# Altium PCB PCB_DYBoard_Transducer_CAN_ADS1113_V1.PcbDoc
Units mm, origin at the board's own origin, x right, y up, seen from the top; angles counter-clockwise.
Board outline 152.4 x 101.6 mm, 2 copper layers (Top Layer, Bottom Layer); 29 components, 13 nets, 66 pads, 52 vias.
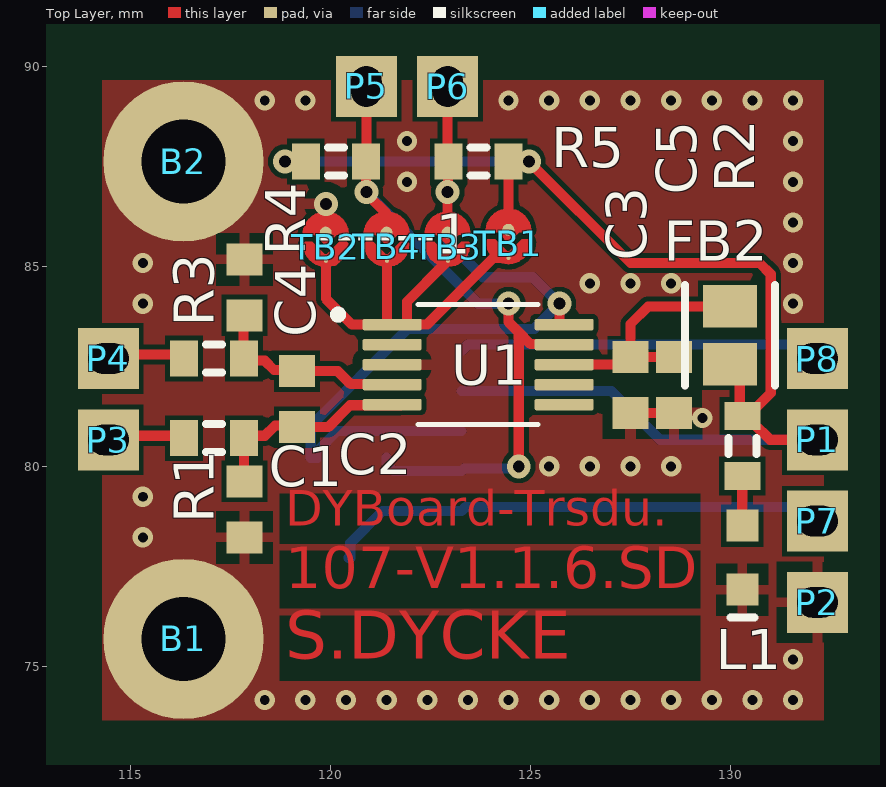
[diagram p0: Top Layer view]
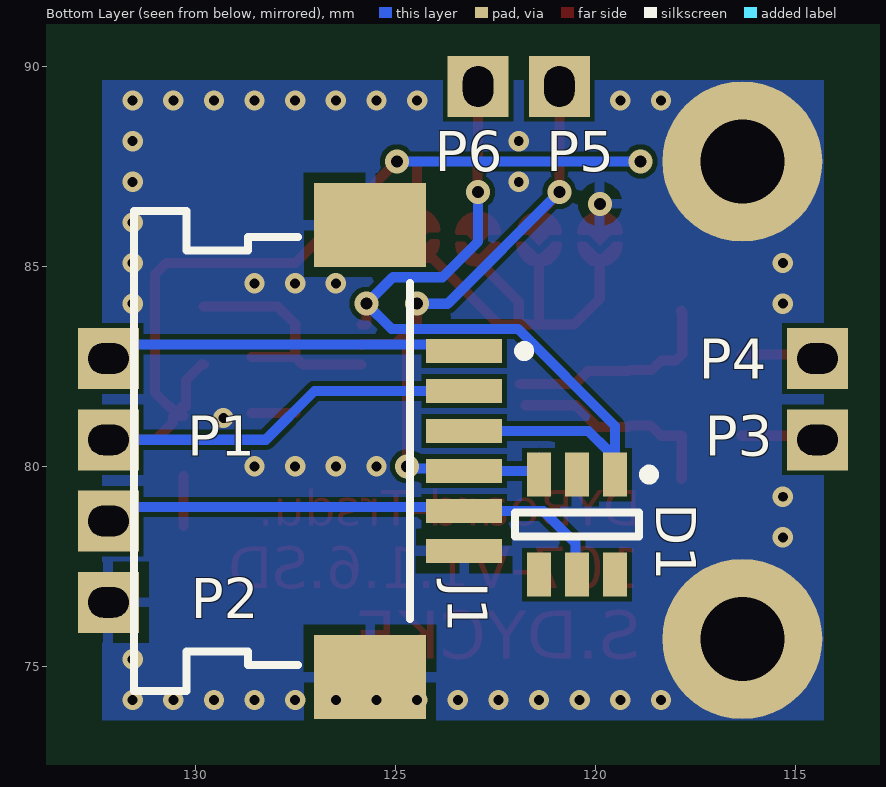
[diagram p1: Bottom Layer view, seen from below]

## Layer stack, top to bottom
Top Solder: solder mask 0.0102, Solder Resist, Dk 3.5
Top Layer: signal copper 0.0356
Dielectric 1: dielectric 0.32, FR-4, Dk 4.8
Bottom Layer: signal copper 0.0356
Bottom Solder: solder mask 0.0102, Solder Resist, Dk 3.5

## Board outline
25.4,25.4 177.8,25.4 177.8,127 25.4,127

## Design rules (kind name [scope] priority, off if disabled: settings)
Clearance [All] p1: gap=0.127 ignorepadtopadclearanceinfootprint=FALSE
ComponentClearance [All] p1: gap=0.127 collisioncheckmode=3 verticalgap=0.127 showdistances=FALSE
HoleToHoleClearance [All] p1: gap=0.127 allowstackedmicrovias=TRUE
MinimumSolderMaskSliver [All] p1: minsoldermaskwidth=0.127
PlaneConnect [All] p1: planeconnectstyle=Relief reliefexpansion=0.508 reliefentries=4 reliefconductorwidth=0.254 reliefairgap=0.127
PolygonConnect PolygonConnect_2 [HasFootprint('v60h30m70')] p1: connectstyle=Direct reliefconductorwidth=0.254 reliefentries=4 polygonreliefangle="90 Angle" airgapwidth=0.254
PolygonConnect PolygonConnect_1 [HasFootprint('bolt_M2')] p2: connectstyle=Direct reliefconductorwidth=0.254 reliefentries=4 polygonreliefangle="90 Angle" airgapwidth=0.254
PolygonConnect [All] p3: connectstyle=Relief reliefconductorwidth=0.254 reliefentries=4 polygonreliefangle="90 Angle" airgapwidth=0.254
RoutingVias [All] p1: holewidth=0.3 width=0.6 viastyle="Through Hole" minholewidth=0.3 minwidth=0.67 maxholewidth=1 maxwidth=1.27
SilkToSilkClearance [All] p1: silktosilkclearance=0.127
SilkToSolderMaskClearance [IsPad] p1: minsilkscreentomaskgap=0.127 clearancetoexposedcopper=TRUE
SolderMaskExpansion [All] p1: expansion=0.102 istentingtop=FALSE
UnRoutedNet [All] p1: checkbadconnections=TRUE
Width [All] p1: maxlimit=1.016 minlimit=0.254 preferedwidth=0.254
23 further rules are at their usual default settings.

## Components (designator, comment, footprint, x,y, rotation, side; value= is the part's Value field where it differs from the comment)
B1 "bolt_M2" bolt_M2#1 116.332,75.692 r0 top
B2 "bolt_M2" bolt_M2#2 130.302,87.63 r0 top
C1 "Cap Semi" 1608[0603] 117.856,78.932 r270 top value=0pF
C2 "Cap Semi" 1608[0603] 119.172,81.688 r270 top value=0pF
C3 "Cap Semi" 1608[0603] 127.508,82.042 r90 top value=100nF
C4 "Cap Semi" 1608[0603] 117.856,84.482 r270 top value=0pF
C5 "Cap Semi" 1608[0603] 128.6,82.042 r90 top value=1µF
D1 "SRV05-4.TCT" SMTC-SOT23-6_V 120.462,78.552 r270 bottom
FB2 "BLM21PG121SN1D" FP-BLM21-0_2-t0_85-e0_5-d-IPC_C 129.997,83.287 r270 top
J1 "SEB_MOLeX_6p" SEB_MOLeX_6p 128.016,80.518 r270 bottom locked
L1 "150060BS75000" 0603_A 130.302,77.724 r90 top (schematic designator LED1)
P1 "solderPad" solderPad_2#1 132.08,81.026 r0 top
P2 "solderPad" solderPad_2#1 132.08,76.962 r0 top
P3 "solderPad" solderPad_2#2 114.4,80.772 r0 top
P4 "solderPad" solderPad_2#3 114.554,82.704 r0 top
P5 "solderPad" solderPad_2#4 120.904,89.408 r90 top
P6 "solderPad" solderPad_2#4 122.936,89.408 r90 top
P7 "solderPad" solderPad_2#1 132.08,78.994 r0 top
P8 "solderPad" solderPad_2#1 132.08,83.058 r0 top
R1 "Res3" J1-0603 117.094,80.712 r0 top
R2 "Res3" J1-0603 130.302,80.518 r90 top
R3 "Res3" J1-0603 117.094,82.704 r0 top
R4 "Res3" J1-0603 120.142,87.63 r180 top
R5 "Res3" J1-0603 123.71,87.63 r0 top
TB1 "tin_bridge" tin_bridge#1 124.46,86.52 r180 top
TB2 "tin_bridge" tin_bridge#2 119.893,86.45 r180 top
TB3 "tin_bridge" tin_bridge#1 122.941,86.45 r180 top
TB4 "tin_bridge" tin_bridge#3 121.417,86.45 r180 top
U1 "ADS1113BQDGSRQ1" SOP50P490X110-10N 123.698,82.55 r0 top

## Footprints (in the part's own frame and the unit in brackets; to place one, negate y for a bottom-side part, rotate by r counter-clockwise, add the part's x,y. Pads: shape width x height; smd on the part's side, far side on the other; paste and mask are expansions set on the pad)
0603_A [mm] "Chip LED, 2-Leads, Body 1.6x0.8mm, IPC Medium Density"
  rect 0.8x0.8 smd: 1(-0.8,0) 2(0.8,0)
  silkscreen extent -1.5,-0.3 -1.5,0.3, body extent -0.8,-0.4 0.8,0.4, height 0.7
1608[0603] [mm] "Chip Capacitor, Body 1.6x0.8mm, IPC High Density"
  rect 0.8x0.9 smd: 1(-0.7,0) 2(0.7,0)
  body extent -0.87,-0.48 0.87,0.48, height 1.3
bolt_M2#1 [mm]
  round 4 hole 2.1: 20(0,0)
bolt_M2#2 [mm]
  round 4 hole 2.1: 20(-13.97,0)
FP-BLM21-0_2-t0_85-e0_5-d-IPC_C [mm]
  rect 1.055x1.356 smd paste+0 mask+0: 1(-0.726,0) 2(0.726,0)
  silkscreen extent -1.25,-1.12 1.25,1.12, body extent -1.35,-0.82 1.35,0.82, height 0.25
J1-0603 [mm] "Chip Resistor, Body 1.6x0.8mm, IPC High Density"
  rect 0.7x0.9 smd: 1(-0.75,0) 2(0.75,0)
  silkscreen extent -0.2,-0.35 0.2,0.35, body extent -0.85,-0.48 0.85,0.48, height 0.9
SEB_MOLeX_6p [mm] "52207-0633"
  rect 0.6x1.9 smd: 1(-2.373,4.731) 2(-1.373,4.731) 3(-0.373,4.731) 4(0.627,4.731) 5(1.627,4.731) 6(2.627,4.731)
  rect 2.1x2.8 smd: MP1(-5.523,2.381) MP2(5.777,2.381)
  silkscreen extent -5.87,-3.52 6.13,6.36, body extent -6.02,-3.47 6.28,5.44, height 2.71
SMTC-SOT23-6_V [mm] "SOT23, 6-Leads, Body 3.15x1.7mm, Pitch 0.95mm"
  rect 1.1x0.6 smd: 1(-1.25,0.95) 2(-1.25,0) 3(-1.25,-0.95) 4(1.25,-0.95) 5(1.25,0) 6(1.25,0.95)
  silkscreen extent -1.37,-1.55 0.3,1.92, body extent -0.87,-1.55 0.87,1.55, height 1.45
solderPad_2#1 [mil]
  rect 60x60 hole 30 slot 40 at 0 deg: 20(3.94,-13.94)
solderPad_2#2 [mil]
  rect 60x60 hole 30 slot 40 at 0 deg: 20(2.13,-3.94)
solderPad_2#3 [mil]
  rect 60x60 hole 30 slot 40 at 0 deg: 20(-3.94,0)
solderPad_2#4 [mil]
  rect 60x60 hole 30 slot 40 at 0 deg: 20(3.94,0)
SOP50P490X110-10N [mm]
  rrect25% 1.47x0.28 smd: 1(-2.15,1) 2(-2.15,0.5) 3(-2.15,0) 4(-2.15,-0.5) 5(-2.15,-1) 6(2.15,-1) 7(2.15,-0.5) 8(2.15,0) 9(2.15,0.5) 10(2.15,1)
  silkscreen extent -3.6,-1.5 1.5,1.5
tin_bridge#1 [mm]
  round 0.1 smd mask+0: 21(0,1.303)
  round 0.3 smd mask+0: 22(0.005,0.598)
  Top Layer region: -0.509,0.598 -0.503,0.598 -0.249,0.127 0.254,0.127 0.519,0.598 0.259,0.598 0.005,0.852 -0.249,0.598 -0.503,0.598
  Top Layer region: -0.508,0.889 -0.354,0.889 -0.051,1.192 0.056,1.192 0.359,0.889 0.513,0.889 0.508,0.894 0.381,1.143 0.254,1.397 -0.254,1.397 -0.381,1.143
  Top Layer lines w0.127: 0.519,0.598 cw(c0.005,0.643) 0.002,0.127 cw(c0.005,0.643) -0.509,0.598 ; 0.513,0.598 0.259,0.598 0.132,0.725 0.005,0.852 -0.122,0.725 -0.249,0.598 -0.503,0.598 ; 0.513,0.889 ccw(c0.005,0.889) 0.299,1.303 ccw(c0.005,0.889) 0,1.397 ccw(c0.005,0.889) -0.503,0.889 -0.354,0.889 -0.051,1.192 0,1.192 0.056,1.192 0.359,0.889 0.513,0.889
tin_bridge#2 [mm]
  round 0.1 smd mask+0: 21(0,1.303)
  round 0.3 smd mask+0: 22(0.005,0.598)
  Top Layer region: -0.509,0.598 -0.503,0.598 -0.249,0.127 0.254,0.127 0.519,0.598 0.259,0.598 0.005,0.852 -0.249,0.598 -0.503,0.598
  Top Layer region: -0.508,0.889 -0.354,0.889 -0.051,1.192 0.056,1.192 0.359,0.889 0.513,0.889 0.508,0.894 0.381,1.143 0.254,1.397 -0.254,1.397 -0.381,1.143
  Top Layer lines w0.127: 0.519,0.598 cw(c0.005,0.643) 0.005,0.127 cw(c0.005,0.643) -0.509,0.598 ; 0.513,0.598 0.259,0.598 0.132,0.725 0.005,0.852 -0.122,0.725 -0.249,0.598 -0.503,0.598 ; 0.513,0.889 ccw(c0.005,0.889) 0.005,1.397 ccw(c0.005,0.889) 0,1.397 ccw(c0.005,0.889) -0.115,1.383 ccw(c0.005,0.889) -0.23,1.339 ccw(c0.005,0.889) -0.503,0.889 -0.354,0.889 -0.051,1.192 0,1.192 0.056,1.192 0.359,0.889 0.513,0.889
tin_bridge#3 [mm]
  round 0.1 smd mask+0: 21(0,1.303)
  round 0.3 smd mask+0: 22(0.005,0.598)
  Top Layer region: -0.509,0.598 -0.503,0.598 -0.249,0.127 0.254,0.127 0.519,0.598 0.259,0.598 0.005,0.852 -0.249,0.598 -0.503,0.598
  Top Layer region: -0.508,0.889 -0.354,0.889 -0.051,1.192 0.056,1.192 0.359,0.889 0.513,0.889 0.508,0.894 0.381,1.143 0.254,1.397 -0.254,1.397 -0.381,1.143
  Top Layer lines w0.127: 0.519,0.598 cw(c0.005,0.643) 0.005,0.127 cw(c0.005,0.643) -0.509,0.598 ; 0.513,0.598 0.259,0.598 0.132,0.725 0.005,0.852 -0.122,0.725 -0.249,0.598 -0.503,0.598 ; 0.513,0.889 ccw(c0.005,0.889) 0,1.397 ccw(c0.005,0.889) -0.503,0.889 -0.354,0.889 -0.051,1.192 0,1.192 0.056,1.192 0.359,0.889 0.513,0.889

## Part data
C1 C2 C3 C4 C5: "Capacitor (Semiconductor SIM Model)", LatestRevisionDate=29-May-2009, LatestRevisionNote="IPC-7351 Footprint Added.", PackageDescription="Chip Capacitor", PackageReference=C1206, Published=8-Jun-2000, Publisher="Altium Limited"
D1: library part CMP-2000-05358-1, "RailClamp(R) Low Capacitance TVS Diode Array, 5 pF, 17.5 VC, -55 to 125 degC, 6-Pin SOT23, RoHS, Tape and Reel", Capacitance Value=5pF, Clamping Voltage=17.5V, Clamping Voltage (Max)=12.5V, Leakage Current=5uA, Manufacturer=Semtech, Operating Temp Range=-55Cto125C, Operating Temperature Classification=Military, Operating Temperature Max Deg. C=125C, Operating Temperature Min Deg. C=-55C, Package / Case=SOT-23, Package Description="6-Pin Small Outline Transistor, Body 2.9 x 1.6 mm, Pitch 0.95 mm", Package Reference=SOT23-6, Peak Pulse Current=12A, Peak Pulse Power Dissipation=300W, Reverse Breakdown Voltage=6V, Reverse Stand-off Voltage=5V, Test Current (It)=1mA, Configuration=Quad, Datasheet URL=https://datasheet.ciiva.com/8029/srv05-4-8029973.pdf, Datasheet Version=Jan-08, Direction Type=Uni-Directional, Leakage Current (Max)=5uA, Manufacturer URL=http://www.semtech.com/, Mounting=SurfaceMount, Mounting Style=SurfaceMount, Number of Elements=1, Packaging=TapeandReel, Pin Count=6, Polarity=Uni-Directional, Product Depth (mm)=1.6mm, Product Height (mm)=1.15mm, Product Length (mm)=2.9mm, Rad Hardened=No, Suppressor Type=DiodeArrays, Working Voltage=5V, Working Voltage (Max)=5V
FB2: library part CMP-0686-00612-3, "Chip Ferrite Bead, 0805, 120Ω @ 100MHz, 0.03Ω, 25%, 3A", Case Code (Imperial)=0805, Case Code (Metric)=2012, Current Rating=3A, DC Resistance (DCR)=30mR, Max Operating Temperature=125°C, Min Operating Temperature=-55°C, Package Quantity=1, Test Frequency=100MHz, Tolerance=25%, Case/Package=0805, DC Resistance-Max=30mR, Depth=1.25mm, Height=0.85mm, Impedance=120R, Lead Free="Lead Free", Length=2mm, Material=Steel, Max Current Rating=3A, Max DC Current=3A, Number of Circuits=1, Number of Lines=1, Number of Pins=2, Packaging="Tape and Reel", REACH SVHC="No SVHC", RoHS Compliant=Yes, Series=BLM21P, Termination=SMD/SMT, Width=1.25mm
L1: library part CMP-1426-00003-1, "SMD mono-color Chip LED, WL-SMCW, Blue", Color=Blue, Manufacturer="Wuerth Elektronik", ComponentLink1Description="Manufacturer URL", ComponentLink1URL=http://www.we-online.com, ComponentLink2Description=Datasheet, ComponentLink2URL=http://katalog.we-online.com/led/datasheet/150060BS75000.pdf, PackageReference=0603_A, PartNumber=150060BS75000
R1 R2 R3 R4 R5: "Resistor", LatestRevisionDate=29-May-2009, LatestRevisionNote="IPC-7351 Footprint Added.", PackageDescription="Chip Resistor", PackageReference=J1-0603, Published=8-Jun-2000, Publisher="Altium Limited"
U1: Package=None, Availability=Unavailable, MP=ADS1113BQDGSRQ1, Price=None

## Via types
v1: diameter 0.508, hole 0.25, Top Layer to Bottom Layer, 44 vias
v2: diameter 0.6, hole 0.3, Top Layer to Bottom Layer, 8 vias

## Nets (pads, with @x,y where several pads share a name; then routed paths per layer and width w, separated by ;. In a path a pad name is that pad's centre, name@x,y a point inside that pad or via, vN(x,y) a via of type N, cw(c..) or ccw(c..) an arc to the next point about the centre after c; other vN are vias at no path point)
(3.3V): D1.5 J1.5 P7.20 | length 12.5
  Bottom Layer w0.254: D1.5@120.462,77.724 120.501,77.724 120.502,77.725 120.502,78.084 121.309,78.891 J1.5 123.388,78.994 P7.20@132.18,78.994
(-5V): J1.1 P8.20 | length 9
  Bottom Layer w0.254: J1.1 123.452,83.058 P8.20@132.18,83.058
+5V: FB2.2 J1.2 P1.20 R2.2 R4.2 R5.2 TB1.22 | length 31.4
  Top Layer w0.254: 124.458,86.487 124.46,86.49 R5.2 ; v2(124.968,87.63) 127.508,85.09 130.734,85.09 131.013,84.811 131.013,81.843 130.661,81.491 130.625,81.491 R2.2@130.544,81.41 ; FB2.2@129.794,82.55 129.85,82.55 130.24,82.16 130.24,81.491 130.345,81.491 130.568,81.268 130.568,81.102 130.998,80.672 P1.20 ; R2.2 R2.2@130.544,81.268
  Bottom Layer w0.254: v2(118.872,87.63) v2(124.968,87.63) ; J1.2 127.027,81.891 128.245,80.672 P1.20
AN: P3.20 R1.1 | length 1.9
  Top Layer w0.254: P3.20@114.454,80.772 R1.1@116.344,80.772
AP: P4.20 R3.1 | length 1.9
  Top Layer w0.254: P4.20@114.454,82.804 R3.1@116.344,82.804
GND: B1.20 B2.20 C1.2 C3.1 C4.1 C5.1 D1.2 J1.6 J1.MP1 J1.MP2 L1.1 P2.20 TB2.22 U1.3 | length 1.6
  Top Layer w0.254: 119.888,86.106 119.888,86.323 119.888,86.567 v2(119.893,86.572) ; C3.1 C5.1
  other v1: 118.364,74.168 119.38,74.168 120.396,74.168 121.412,74.168 122.428,74.168 123.444,74.168 124.46,74.168 125.476,74.168 126.492,74.168 127.508,74.168 128.524,74.168 129.54,74.168 130.556,74.168 131.572,74.168 131.572,75.184 115.316,78.232 115.316,79.248 125.476,80.01 126.492,80.01 127.508,80.01 128.524,80.01 129.304,81.215 115.316,84.074 131.572,84.074 126.492,84.582 127.508,84.582 128.524,84.582 115.316,85.09 131.572,85.09 131.572,86.106 121.92,87.122 131.572,87.122 121.92,88.138 131.572,88.138 118.364,89.154 119.38,89.154 124.46,89.154 125.476,89.154 126.492,89.154 127.508,89.154 128.524,89.154 129.54,89.154 130.556,89.154 131.572,89.154
NetC1_1: C1.1 C2.2 R1.2 U1.5 | length 5.3
  Top Layer w0.254: C1.1@117.856,79.694 117.844,79.706 R1.2 117.844,80.772 118.364,80.772 118.623,81.031 119.129,81.031 C2.2 119.95,80.988 120.496,81.534 U1.5@121.752,81.534
NetC2_1: C2.1 C4.2 R3.2 U1.4 | length 5.5
  Top Layer w0.254: R3.2@117.832,82.804 117.832,83.858 117.856,83.882 C4.2@117.856,83.906 ; R3.2@117.844,82.804 117.993,82.655 118.364,82.655 118.364,82.648 118.595,82.417 119.143,82.417 C2.1 120.192,82.388 120.517,82.063 U1.4@121.896,82.063
NetC3_2: C3.2 C5.2 FB2.1 U1.8 | length 6.1
  Top Layer w0.254: U1.8 127.316,82.55 C3.2 ; C5.2 C3.2 ; FB2.1@129.794,84.001 127.943,84.001 127.508,83.566 C3.2
NetLED1_2: L1.2 R2.1 | length 1.2
  Top Layer w0.254: L1.2 R2.1
NetTB1_21: TB1.21 TB2.21 TB3.21 TB4.21 U1.1 | length 10.5
  Top Layer w0.254: 120.087,85.147 120.008,85.147 TB2.21 119.893,84.202 120.545,83.55 U1.1@121.417,83.55 ; TB4.21 121.417,85.053 U1.1@121.417,83.55 ; U1.1@121.716,83.563 121.92,83.563 121.92,84.126 122.854,85.06 TB3.21 ; TB1.21 124.161,85.217 124.079,85.217 122.412,83.55 121.703,83.55 U1.1 U1.1@121.417,83.55
SCL: D1.1 J1.3 P6.20 R5.1 TB3.22 U1.10 | length 20.9
  Top Layer w0.254: P6.20 122.936,87.63 122.948,87.618 122.948,86.88 v2(122.936,86.868) 122.936,86.326 122.938,86.323 ; v2(125.73,84.074) 125.73,83.563 125.743,83.55 U1.10
  Bottom Layer w0.254: v2(122.936,86.868) 122.936,85.629 123.828,84.737 125.067,84.737 v2(125.73,84.074) 125.101,83.445 121.941,83.445 119.512,81.016 119.512,80.224 119.684,80.224 119.685,80.225 119.685,80.397 120.179,80.891 J1.3
SDA: D1.3 J1.4 P5.20 R4.1 TB4.22 U1.9 | length 17.1
  Top Layer w0.254: P5.20 120.904,87.642 R4.1 120.898,87.624 120.898,86.874 v2(120.904,86.868) 120.904,86.831 121.412,86.323 ; v2(124.46,84.074) 124.46,83.613 124.714,83.359 ; v2(124.714,80.01) 124.714,83.359 ; U1.9 125.835,83.063 125.01,83.063 124.714,83.359
  Bottom Layer w0.254: v2(120.904,86.868) 123.698,84.074 v2(124.46,84.074) ; D1.3@121.412,80.224 121.412,80.064 121.585,79.891 J1.4 123.344,79.95 124.654,79.95 v2(124.714,80.01)
pads on no net: D1.4 D1.6 U1.2 U1.6 U1.7

## Polygon pours and split planes (outlines as drawn)
no net on Top Solder "NONET_L-01_P-001" (solid, pour order 8): 118.745,76.276 118.745,74.652 129.25,74.652 129.25,76.276
no net on Top Solder "NONET_L-01_P-001" (solid, pour order 7): 129.254,77.894 129.254,76.456 118.745,76.456 118.745,77.894
no net on Top Solder "NONET_L-01_P-001" (solid, pour order 6): 118.745,79.32 118.745,78.075 129.257,78.075 129.257,79.32
GND on Top Layer "NONET_L-01_P-001" (solid, pour order 0): 114.3,89.662 114.3,73.66 132.334,73.66 132.334,89.662
GND on Bottom Layer "NONET_L-01_P-001" (solid, pour order 1): 114.3,89.662 114.3,73.66 132.334,73.66 132.334,89.662

## Other copper
Top Layer:
  text "DYBoard-Trsdu." at 118.872,78.218 h1.52
  text "107-V1.1.6.SD" at 118.872,76.604 h1.78
  text "S.DYCKE" at 118.872,74.804 h2.06

## Silkscreen, mask and mechanical layers (free items; w line width, h text height)
Top Overlay:
  text "------1" at 119.644,85.317 h1
Mechanical 1:
  lines w0.127: 114.3,73.66 132.3,73.66 132.3,89.662 114.3,89.662 114.3,73.66